# Altium PCB USB2514 PCB v1.PcbDoc
Units mm, origin at the board's own origin, x right, y up, seen from the top; angles counter-clockwise.
Board outline 47 x 45 mm, 2 copper layers (Top Layer, Bottom Layer); 57 components, 45 nets, 195 pads, 88 vias.
Unrouted connection lines stored in the file: 3.
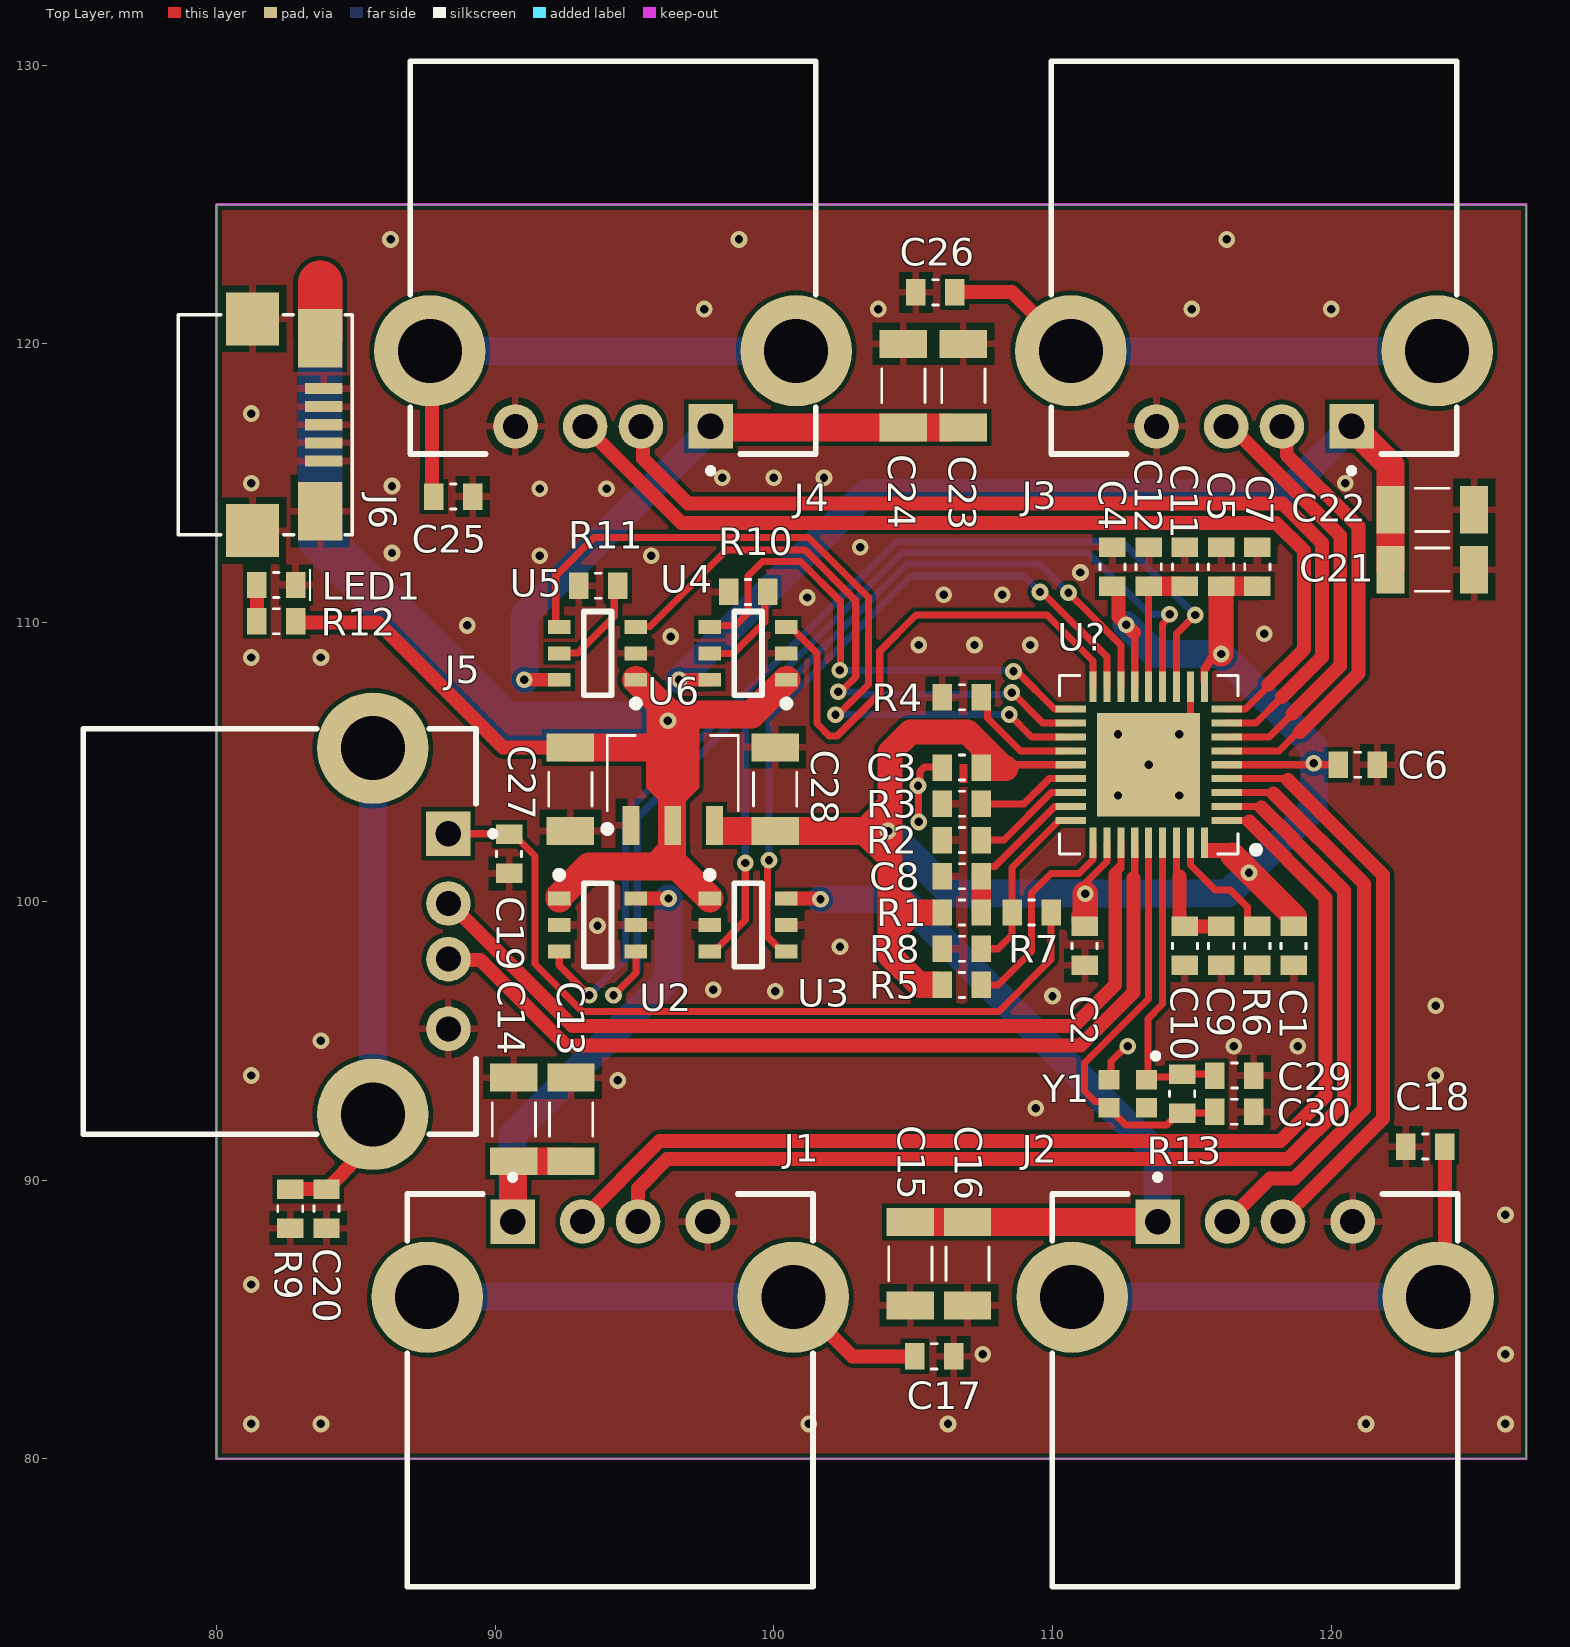
[diagram p0: Top Layer view]
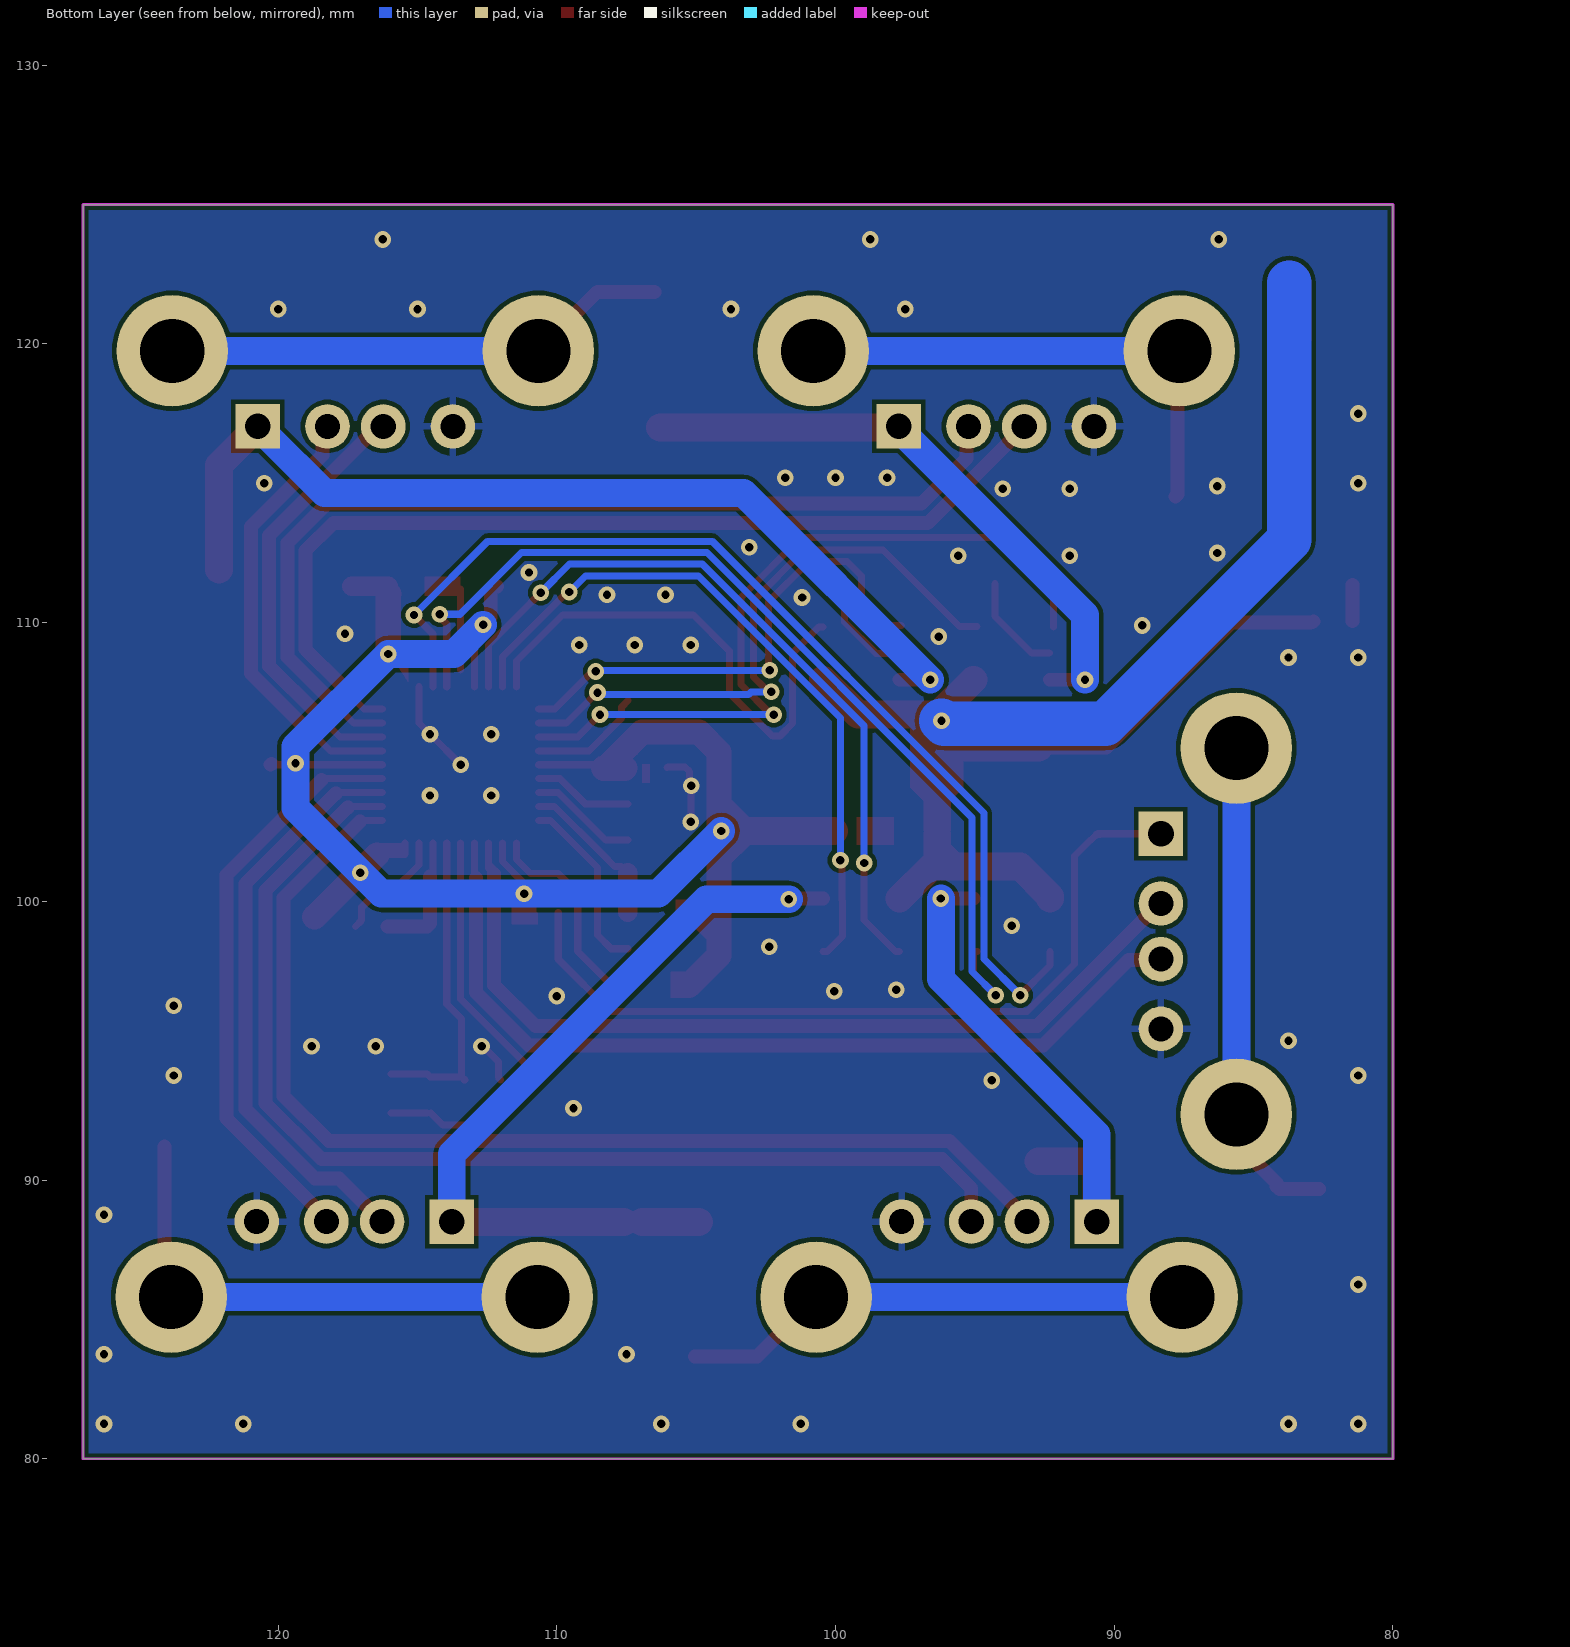
[diagram p1: Bottom Layer view, seen from below]
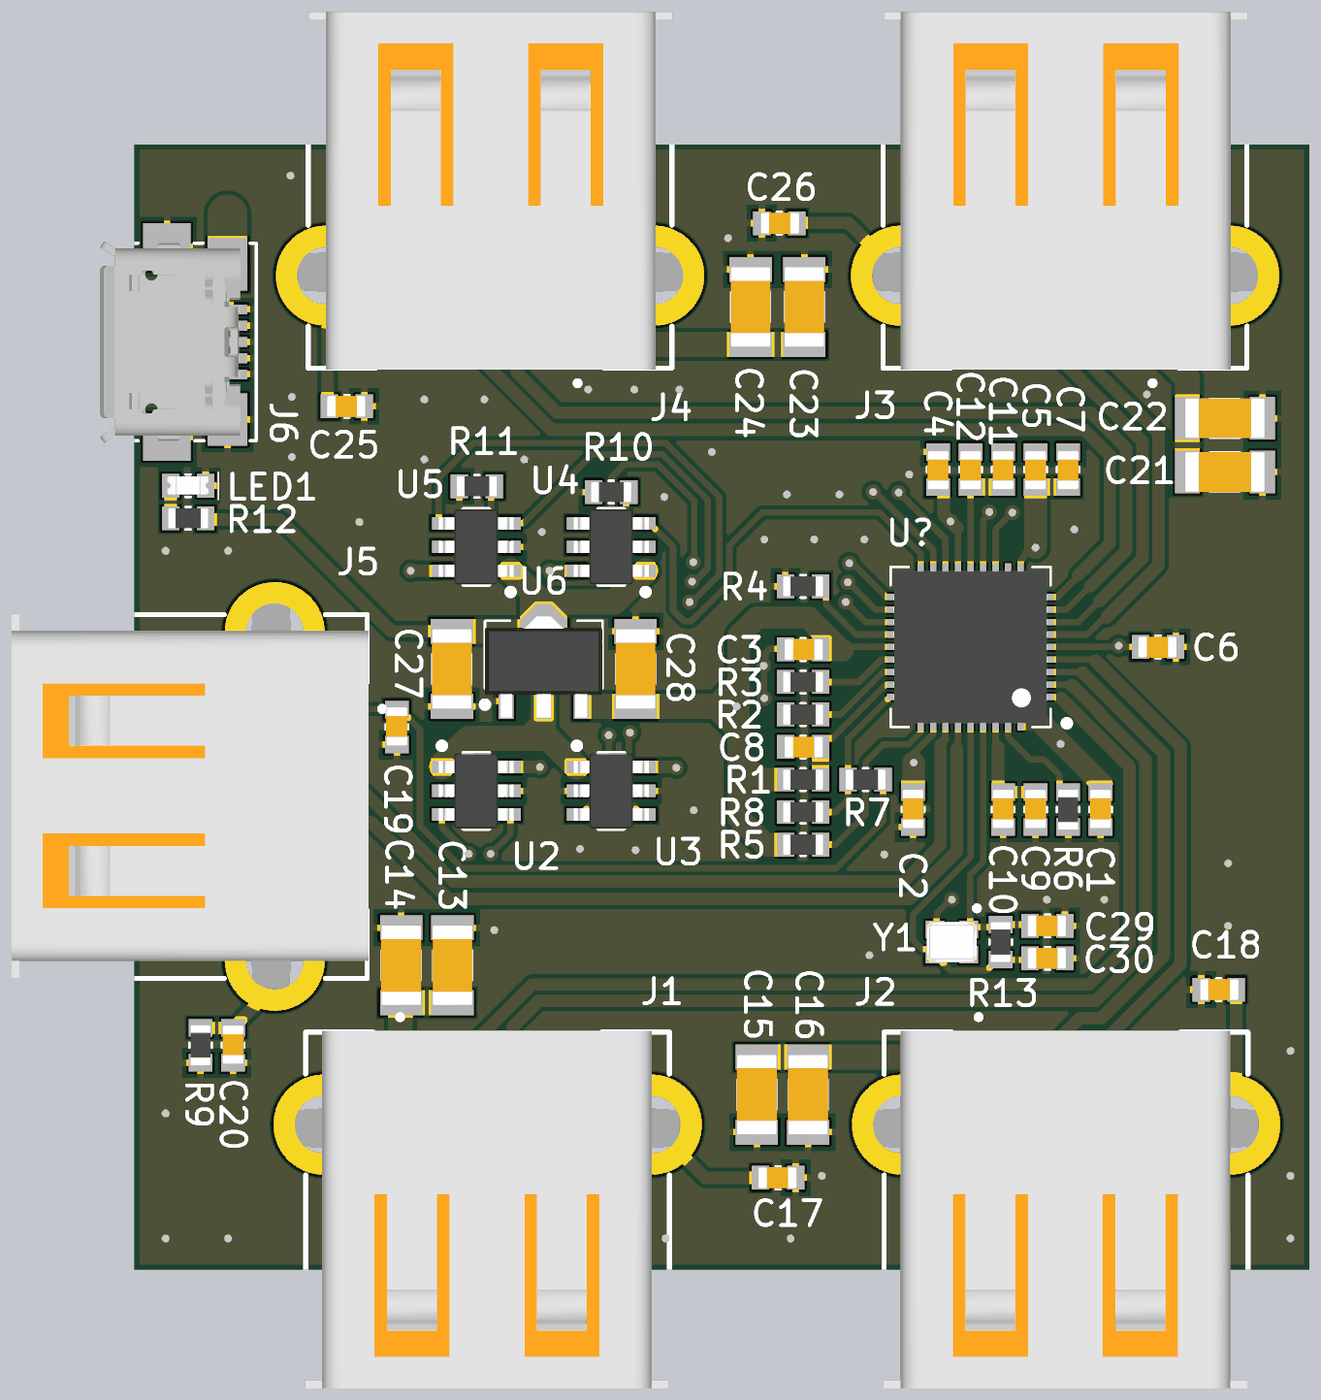
[diagram p2: 3D render of the assembled board from above, using the file's embedded part models]

## Layer stack, top to bottom
Top Solder: solder mask 0.0102, Solder Resist, Dk 3.5
Top Layer: signal copper 0.0356
Dielectric 1: dielectric 0.32, FR-4, Dk 4.8
Bottom Layer: signal copper 0.0356
Bottom Solder: solder mask 0.0102, Solder Resist, Dk 3.5

## Board outline
80,80 80,125 127,125 127,80

## Design rules (kind name [scope] priority, off if disabled: settings)
Clearance [All] p1: gap=0.152 ignorepadtopadclearanceinfootprint=FALSE
DiffPairsRouting [All] p1: maxlimit=0.254 minlimit=0.1 mostfreqgap=0.152 toplayer_minwidth=0.1 toplayer_maxwidth=1 toplayer_prefwidth=0.254 bottomlayer_minwidth=0.1 bottomlayer_maxwidth=1 bottomlayer_prefwidth=0.254 maxuncoupledlength=12.7
PolygonConnect [All] p1: connectstyle=Relief reliefconductorwidth=0.254 reliefentries=4 polygonreliefangle="90 Angle" airgapwidth=0.254
RoutingVias [All] p1: holewidth=0.3 width=0.6 viastyle="Through Hole" minholewidth=0.1 minwidth=0.1 maxholewidth=2 maxwidth=2
ShortCircuit [All] p1: allowed=TRUE
SolderMaskExpansion [All] p1: expansion=0.102 istentingtop=FALSE
Width [All] p1: maxlimit=3 minlimit=0.254 preferedwidth=0.254 minimp=50.000000 maximp=50.000000 favimp=50.000000
28 further rules are at their usual default settings.

## Classes and differential pairs
component class "USB2514 USB PORTS": C13 C14 C15 C16 C17 C18 C19 C21 C22 C23 C24 C25 C26 J1 J2 J3 J4 J5 R7 R8
component class "USB2514 REGULATOR": C27 C28 J6 LED1 R12
component class "USB2514 POWER DISTRIBUTION SWITCHES": R10 R11 U2 U3 U4 U5
component class "USB2514 MCU": C1 C2 C3 C4 C5 C6 C7 C8 C9 C10 C11 C12 R1 R2 R3 R4 R5 R6 U?
component class "USB2514 CRYSTAL": C29 C30 R13 Y1

## Components (designator, comment, footprint, x,y, rotation, side; value= is the part's Value field where it differs from the comment)
C1 "0.1uF" CAPC1608X06N-0603 118.65,98.4 r90 top
C2 "0.1uF" CAPC1608X06N-0603 111.15,98.4 r90 top
C3 "0.1uF" CAPC1608X06N-0603 106.75,104.8 r0 top
C4 "0.1uF" CAPC1608X06N-0603 112.15,112 r270 top
C5 "0.1uF" CAPC1608X06N-0603 116.05,112 r270 top
C6 "0.1uF" CAPC1608X06N-0603 120.95,104.9 r180 top
C7 "4.7uF 6.3V X5R" CAPC1608X06N-0603 117.35,112 r270 top
C8 "0.1uF" CAPC1608X06N-0603 106.75,100.9 r0 top
C9 "0.1uF" CAPC1608X06N-0603 116.05,98.4 r90 top
C10 "1uF 16V X5R" CAPC1608X06N-0603 114.75,98.4 r90 top
C11 "0.1uF" CAPC1608X06N-0603 114.75,112 r270 top
C12 "1uF 16V X5R" CAPC1608X06N-0603 113.45,112 r270 top
C13 "22uF" CAPC3216X10N-1206 92.725,92.175 r270 top
C14 "22uF" CAPC3216X10N-1206 90.675,92.175 r270 top
C15 "22uF" CAPC3216X10N-1206 104.9,87 r90 top
C16 "22uF" CAPC3216X10N-1206 106.95,87 r90 top
C17 "0.1uF" CAPC1608X06N-0603 105.75,83.675 r180 top
C18 "0.1uF" CAPC1608X06N-0603 123.375,91.2 r0 top
C19 "1uF 16V X5R" CAPC1608X06N-0603 90.5,101.7 r90 top
C20 "0.1uF" CAPC1608X06N-0603 83.95,88.975 r90 top
C21 "22uF" CAPC3216X10N-1206 123.625,111.9 r180 top
C22 "22uF" CAPC3216X10N-1206 123.625,114.05 r180 top
C23 "22uF" CAPC3216X10N-1206 106.8,118.5 r270 top
C24 "22uF" CAPC3216X10N-1206 104.65,118.5 r270 top
C25 "0.1uF" CAPC1608X06N-0603 88.5,114.525 r180 top
C26 "0.1uF" CAPC1608X06N-0603 105.8,121.85 r0 top
C27 "10uF" CAPC3216X10N-1206 92.7,104.025 r90 top
C28 "10uF" CAPC3216X10N-1206 100.05,104.025 r270 top
C29 "33pF" CAPC1608X06N-0603 116.525,93.75 r180 top
C30 "33pF" CAPC1608X06N-0603 116.525,92.45 r180 top
J1 "USB-A CONNECTOR" USB_SAMTEC_R-A-S-F-O-TH 90.63,88.51 r0 top
J2 "USB-A CONNECTOR" USB_SAMTEC_R-A-S-F-O-TH 113.77,88.51 r0 top
J3 "USB-A CONNECTOR" USB_SAMTEC_R-A-S-F-O-TH 120.73,117.04 r180 top
J4 "USB-A CONNECTOR" USB_SAMTEC_R-A-S-F-O-TH 97.73,117.04 r180 top
J5 "USB-A CONNECTOR" USB_SAMTEC_R-A-S-F-O-TH 88.325,102.425 r270 top
J6 "MICRO USB2.0" USB_CON_10118192-0001LF_SMD 82.575,117.1 r270 top
LED1 "LED RED" LED_0603 81.45,111.35 r0 top
R1 "100K" RESC1608X06N-0603 106.75,99.6 r180 top
R2 "100K" RESC1608X06N-0603 106.75,102.2 r0 top
R3 "100K" RESC1608X06N-0603 106.75,103.5 r0 top
R4 "100K" RESC1608X06N-0603 106.75,107.325 r0 top
R5 "100K" RESC1608X06N-0603 106.75,97 r180 top
R6 "12K" RESC1608X06N-0603 117.35,98.4 r90 top
R7 "100K" RESC1608X06N-0603 109.25,99.6 r0 top
R8 "100K" RESC1608X06N-0603 106.75,98.3 r0 top
R9 "330" RESC1608X06N-0603 82.65,88.975 r90 top
R10 "390" RESC1608X06N-0603 99.075,111.1 r0 top
R11 "390" RESC1608X06N-0603 93.7,111.325 r0 top
R12 "1K" RESC1608X06N-0603 82.15,110.05 r0 top
R13 "1Meg" RESC1608X06N-0603 114.65,93.1 r270 top
U2 "MIC2019A-1YM6 TR" SOT95P280X90-6N 93.675,99.15 r0 top
U3 "MIC2019A-1YM6 TR" SOT95P280X90-6N 99.075,99.15 r0 top
U4 "MIC2019A-1YM6 TR" SOT95P280X90-6N 99.075,108.9 r180 top
U5 "MIC2019A-1YM6 TR" SOT95P280X90-6N 93.675,108.9 r180 top
U6 "HT7333-1" SOT89-150P350X150-3N 96.375,104.325 r90 top
U? "USB2514BT/M2" QFN50P600X600X100_HS-37N 113.45,104.9 r180 top
Y1 "24 MHz 6 pf CRYSTAL" OSC_XRCGB24M000F2P00R0 112.7,93.1 r270 top

## Footprints (in the part's own frame and the unit in brackets; to place one, negate y for a bottom-side part, rotate by r counter-clockwise, add the part's x,y. Pads: shape width x height; smd on the part's side, far side on the other; paste and mask are expansions set on the pad)
CAPC1608X06N-0603 [mm] "Chip Capacitor, 2-Leads, Body 1,55x0,85mm, IPC Medium Density"
  rect 0.7x0.95 smd: 1(-0.7,0) 2(0.7,0)
  silkscreen extent -0.1,-0.45 0.1,0.45, body extent -0.75,-0.42 0.8,0.43, height 0.55
CAPC3216X10N-1206 [mm] "Chip Capacitor, 2-Leads, Body 3,20x1,60mm, IPC Medium Density"
  rect 1x1.7 smd: 1(-1.5,0) 2(1.5,0)
  silkscreen extent -0.6,-0.77 0.6,0.77, body extent -1.6,-0.8 1.6,0.8, height 1
LED_0603 [mm]
  rect 0.7x0.95 smd: A(0,0) C(1.4,0)
  silkscreen extent 0.6,-0.57 1.95,0.58, body extent -0.13,-0.35 1.53,0.38, height 0.68
OSC_XRCGB24M000F2P00R0 [mm]
  rect 0.7x0.75 smd: 1(-0.5,0.675) 2(-0.5,-0.675) 3(0.5,-0.675) 4(0.5,0.675)
  silkscreen extent -1.45,0.9 -1.25,1.1, body extent -0.8,-1 0.8,1, height 0.7
QFN50P600X600X100_HS-37N [mm] "QFN, 36-Leads, Body 6,00x6,00mm, Pitch 0,50mm, Thermal Pad 3,70x3,70mm, IPC Medium Density"
  rect 1.1x0.254 smd mask+0.076: 1(-2.8,2) 2(-2.8,1.5) 3(-2.8,1) 4(-2.8,0.5) 5(-2.8,0) 6(-2.8,-0.5) 7(-2.8,-1) 8(-2.8,-1.5) 9(-2.8,-2) 19(2.8,-2) 20(2.8,-1.5) 21(2.8,-1) 22(2.8,-0.5) 23(2.8,0) 24(2.8,0.5) 25(2.8,1) 26(2.8,1.5) 27(2.8,2)
  rect 0.254x1.1 smd mask+0.076: 10(-2,-2.8) 11(-1.5,-2.8) 12(-1,-2.8) 13(-0.5,-2.8) 14(0,-2.8) 15(0.5,-2.8) 16(1,-2.8) 17(1.5,-2.8) 18(2,-2.8) 28(2,2.8) 29(1.5,2.8) 30(1,2.8) 31(0.5,2.8) 32(0,2.8) 33(-0.5,2.8) 34(-1,2.8) 35(-1.5,2.8) 36(-2,2.8)
  rect 3.7x3.7 smd: 37(0,0)
  silkscreen extent -3.98,-3.2 3.2,3.2, body extent -3.07,-3.07 3.07,3.07, height 1
RESC1608X06N-0603 [mm] "Chip Capacitor, 2-Leads, Body 1,55x0,85mm, IPC Medium Density"
  rect 0.7x0.95 smd: 1(-0.7,0) 2(0.7,0)
  silkscreen extent -0.1,-0.45 0.1,0.45, body extent -0.8,-0.4 0.8,0.4, height 0.8
SOT89-150P350X150-3N [mm] "SOT89, 3-Leads, Body 4,55x2,50mm, Pitch 1,50mm, Lead Span 3,5mm, IPC Medium Density"
  rect 1.4x0.6 smd: 1(-1.6,1.5) 2(-1.6,0) 3(-1.6,-1.5)
  Top Layer region: -1,0.2 -0.25,0.95 1.65,0.95 2.3,0.3 2.3,-0.3 1.65,-0.95 -0.25,-0.95 -1,-0.2
  silkscreen extent -1.85,-2.35 1.62,2.47, body extent -2.25,-2.35 1.8,2.35, height 1.5
SOT95P280X90-6N [mm] "SOT23, 6-Leads, Body 2,90x2,80mm, Pitch 0,95mm, IPC Medium Density"
  rect 0.8x0.5 smd: 1(-1.375,0.95) 2(-1.375,0) 3(-1.375,-0.95) 4(1.375,-0.95) 5(1.375,0) 6(1.375,0.95)
  silkscreen extent -1.5,-1.5 0.5,1.92, body extent -1.5,-1.5 1.5,1.5, height 0.9
USB_CON_10118192-0001LF_SMD [mm] "USB2.0 MICRO"
  rect 0.4x1.35 smd: 1(-1.3,1.275) 2(-0.65,1.275) 3(0,1.275) 4(0.65,1.275) 5(1.3,1.275)
  rect 2.1x1.6 smd: 6(-3.1,1.15) 7(3.1,1.15)
  rect 1.9x1.9 smd: 8(-3.8,-1.275) 9(3.8,-1.275)
  silkscreen extent -3.95,-3.94 3.95,2.3, body extent -4.04,-3.94 4.04,1.66, height 2.81
USB_SAMTEC_R-A-S-F-O-TH [mm]
  rect 1.6x1.6 hole 0.92: 1(0,0)
  round 1.6 hole 0.9: 2(2.5,0) 3(4.5,0) 4(7,0)
  round 4 hole 2.3: S1(-3.07,-2.71) S2(10.07,-2.71)
  silkscreen extent -3.77,-13.11 10.78,1.69, body extent -4.37,-13.25 11.32,1.05, height 7.5

## Part data
C1 C2 C3 C4 C5 C6 C7 C8 C9 C10 C11 C12 C17 C18 C19 C20 C25 C26 C29 C30: library part CAP_0603_0.1uF
C13 C14 C15 C16 C21 C22 C23 C24 C27 C28: library part CAP_1206_22uF
J1 J2 J3 J4 J5: library part USBR-A-S-F-O-TH, "USB-A _USB TYPE-A_ USB 2.0 Receptacle Connector 4 Position Through Hole, Right Angle", Package=None, Availability=Unavailable, DigiKey-Purchase-URL=https://snapeda.com/shop?store=DigiKey&id=932528, MF=Samtec, MP=USBR-A-S-F-O-TH, Price=None, SnapEDA_Link=https://www.snapeda.com/parts/USBR-A-S-F-O-TH/Samtec%20Inc./view-part/932528/?ref=snap, Toby_UK-Purchase-URL=https://snapeda.com/shop?store=Toby+UK&id=932528
J6: library part USB_CON-10118192-0002LF-SMD, "USB - micro B USB 2.0 Receptacle Connector 5 Position Surface Mount, Right Angle", Case/Package=SMD, Manufacturer="Amphenol ICC (FCI)", Manufacturing Part Number=10118192-0002LF, Supplier Part Number-1=609-5379-1-ND, Supplier-1=Digikey
LED1: library part LED_RED_0603
R1 R2 R3 R4 R5 R6: library part RES_0603_10K
R7 R8 R9 R10 R11 R12 R13: library part RES_0603_1K
U6: "HT7333-1 / 30V, 250mA TinyPowerTM LDO"
U?: "USB Hub Controller USB Interface 36-SQFN (6x6)", Package="VFQFN-36 Microchip", Availability=Warning, Check_prices=https://www.snapeda.com/parts/USB2514BT/M2/Microchip/view-part/1051251/?ref=eda, MF=Microchip, MP=USB2514BT/M2, Price=None, Purchase-URL=https://pricing.snapeda.com/search/part/USB2514BT/M2/?ref=eda, SnapEDA_Link=https://www.snapeda.com/parts/USB2514BT/M2/Microchip/view-part/1051251/?ref=snap
Y1: "8 MHz 12.5 pf Osc"

## Via types
v1: diameter 0.6, hole 0.3, Top Layer to Bottom Layer, tented both sides, 88 vias

## Nets (pads, with @x,y where several pads share a name; then routed paths per layer and width w, separated by ;. In a path a pad name is that pad's centre, name@x,y a point inside that pad or via, vN(x,y) a via of type N, cw(c..) or ccw(c..) an arc to the next point about the centre after c; other vN are vias at no path point)
3,3V: C1.2 C2.2 C3.2 C4.2 C5.2 C6.2 C7.2 C28.2 R1.2 R5.2 U6.3 U?.5 U?.10 U?.15 U?.23 U?.29 U?.36 | length 67.8
  Top Layer w0.254: 108.341,104.76 108.481,104.9 U?.23 ; 111.15,100.625 111.95,101.425 U?.29 ; 112.921,109.65 112.95,109.621 U?.15 ; U?.36 115.45,101.677 116.449,101.677 116.463,101.663 ; U?.5 C6.2
  Top Layer w0.5: C4.2 112.271,111.3 112.371,111.2 112.371,110.2 112.921,109.65 ; C6.2@120.244,104.931 C6.2@120.275,104.9
  Top Layer w0.7: C5.2 C7.2
  Top Layer w0.9: v1(104.1,102.525) v1@104.175,102.6 ; 105.45,96.975 105.252,96.975 104.175,98.052 v1@104.175,102.6 ; C3.2@107.55,104.775 108.325,104.775 ; 108.075,104.95 106.95,106.075 104.9,106.075 104.175,105.35 v1@104.175,102.6 ; 111.175,99.625 v1(111.175,100.275) ; C5.2@116.025,111.025 116.05,111 v1(116.05,108.875) ; 116.463,101.663 C1.2@118.688,99.438
  Top Layer w1: C28.2 v1(104.1,102.525)
  Bottom Layer w1: v1(104.1,102.525) 106.35,100.275 v1(111.175,100.275) 116.3,100.275 v1(117.05,101.025) 119.375,103.35 v1(119.375,104.95) 119.375,105.55 v1(116.05,108.875) 113.696,108.875 v1(112.646,109.925)
+5: C27.2 J6.6 R12.2 U2.1 U3.1 U4.1 U5.1 U6.2 | length 57.8
  Top Layer w0.254: v1@95.913,106.475 v1(96.2,106.475)
  Top Layer w0.5: R12.2 82.95,110 85.8,110 90.275,105.525 C27.2
  Top Layer w1: U2.1 92.3,100.177 93.373,101.25 95.764,101.25 ; C27.2 93.343,105.525 96.273,105.525 ; U5.1 96.3,106.7 99.2,106.7 U4.1 ; U6.2@96.35,102.4 96.35,101.836 95.764,101.25 ; U6.2@96.35,102.6 96.35,104.127 ; U3.1 96.55,101.25 95.764,101.25
  Top Layer w1.6: J6.6 83.725,122.2
  Bottom Layer w1.6: 83.725,122.2 83.725,112.975 90.325,106.375 96.1,106.375 v1(96.2,106.475)
GND: C1.1 C2.1 C3.1 C4.1 C5.1 C6.1 C7.1 C8.1 C9.1 C10.1 C11.1 C12.1 C13.1 C14.1 C15.1 C16.1 C17.1 C18.1 C19.1 C20.1 C21.1 C22.1 C23.1 C24.1 C25.1 C26.1 C27.1 C28.1 C29.1 C30.1 J1.4 J2.4 J3.4 J4.4 J5.4 J6.1 J6.2 J6.3 J6.4 J6.5 J6.7 J6.8 J6.9 LED1.C R2.1 R3.1 R4.1 R6.1 R8.1 R9.1 R10.1 R11.1 U2.2 U2.5 U3.2 U3.5 U4.2 U5.2 U6.1 U?.11 U?.37 Y1.2 Y1.4 | length 7.7
  Top Layer w0.254: v1(105.2,102.85) 105.187,102.863 105.187,104.138 v1(105.175,104.15) 105.241,104.216 105.241,104.666 105.4,104.825 106.025,104.825 C3.1 ; Y1.2 112.1,93.675 112.1,94.25 112.65,94.8 v1(112.7,94.8) ; v1(113.45,104.9) v1(114.55,106) 114.95,106.4 U?.11
  other v1: 81.25,81.25 83.75,81.25 101.25,81.25 106.25,81.25 121.25,81.25 126.25,81.25 107.5,83.75 126.25,83.75 81.25,86.25 126.25,88.75 109.4,92.575 94.4,93.575 81.25,93.75 123.75,93.75 116.5,94.8 118.8,94.8 83.75,95 123.75,96.25 110,96.6 100.05,96.775 97.825,96.825 102.375,98.375 93.675,99.125 112.35,103.8 114.55,103.8 112.35,106 81.25,108.75 83.75,108.75 105.2,109.2 107.2,109.2 109.2,109.2 96.3,109.5 117.6,109.6 89,109.9 101.2,110.9 106.1,111 108.2,111 111,111.8 91.6,112.4 95.6,112.4 86.3,112.5 103.1,112.7 91.6,114.8 94,114.8 86.3,114.9 81.25,115 120.5,115 98.15,115.2 100,115.2 101.8,115.2 81.25,117.5 97.5,121.25 103.75,121.25 115,121.25 120,121.25 86.25,123.75 98.75,123.75 116.25,123.75
NetC8_2: C8.2 R1.1 U?.26 | length 5.6
  Top Layer w0.254: C8.2@107.45,101.025 107.673,101.248 107.926,101.248 108.35,101.672 110.078,103.4 U?.26
  Top Layer w0.7: R1.1 C8.2@107.45,101.025
NetC9_2: C9.2 C10.2 U?.34 | length 4.6
  Top Layer w0.254: U?.34 114.45,101 114.55,100.9
  Top Layer w0.5: 114.55,100.9 114.55,99.2 114.65,99.1 C10.2 ; C10.2@114.675,99.1 C9.2@116.075,99.1
NetC11_2: C11.2 C12.2 U?.14 | length 2.9
  Top Layer w0.254: 113.45,108.3 C12.2@113.45,111.2
NetC17_2: C17.2 J1.S1 J1.S2 | length 18.6
  Top Layer w0.5: J1.S1@87.41,85.95 J1.S1 ; J1.S2 102.825,83.675 C17.2
  Bottom Layer w1: J1.S1 J1.S2
NetC18_2: C18.2 J2.S1 J2.S2 | length 19.7
  Top Layer w0.5: J2.S2 J2.S2@123.84,86.747 ; J2.S2@124.075,85.575 C18.2
  Bottom Layer w1: J2.S1 J2.S2
NetC19_2: C19.2 J5.1 R7.2 | length 29.1
  Top Layer w0.254: J5.1 90.575,102.425 C19.2@90.624,102.376 ; C19.2 90.65,102.4 90.65,102.375 90.848,102.177 90.873,102.177 91.425,101.625 91.425,97.75 93.125,96.05 108.08,96.05 109.95,97.92 R7.2
NetC20_2: C20.2 J5.S1 J5.S2 R9.2 | length 17.9
  Top Layer w0.5: R9.2 84.075,89.675 84.175,89.775 84.175,89.9 84.945,90.67 84.945,91.685 J5.S2
  Bottom Layer w1: J5.S2 J5.S1
NetC25_2: C25.2 J4.S1 J4.S2 | length 18.4
  Top Layer w0.5: J4.S2 87.73,119.68 87.73,114.595 C25.2
  Bottom Layer w1: J4.S2 J4.S1
NetC26_2: C26.2 J3.S1 J3.S2 | length 18.2
  Top Layer w0.5: C26.2@106.5,121.859 108.551,121.859 J3.S2
  Bottom Layer w1: J3.S2 J3.S1
NetLED1_A: LED1.A R12.1 | length 1.3
  Top Layer w0.5: R12.1 LED1.A
NetR2_2: R2.2 U?.25 | length 3.9
  Top Layer w0.254: R2.2 108.255,102.2 109.955,103.9 U?.25
NetR3_2: R3.2 U?.24 | length 3.6
  Top Layer w0.254: R3.2 108.981,103.5 109.881,104.4 U?.24
NetR4_2: R4.2 U?.22 | length 4.2
  Top Layer w0.254: R4.2@107.45,107.2 107.673,106.977 107.673,106.577 108.85,105.4 U?.22
NetR5_1: R5.1 U?.28 | length 7.7
  Top Layer w0.254: R5.1 108.05,97 109.25,98.2 109.25,100.3 109.95,101 110.95,101 111.45,101.5 U?.28
NetR6_2: R6.2 U?.35 | length 4.3
  Top Layer w0.254: U?.35 114.95,101.3 115.85,100.4 116.389,100.4 117.002,99.787 117.002,99.323 R6.2@117.225,99.1
NetR10_2: R10.2 U4.5 | length 3.4
  Top Layer w0.254: U4.5 98.553,108.9 99.675,110.022 R10.2@99.675,111
NetR11_2: R11.2 U5.5 | length 3.7
  Top Layer w0.254: U5.5@92.325,108.912 92.966,108.912 94.275,110.22 R11.2@94.275,111.399
OCS_N1: U2.4 U?.13 | length 35.4
  Top Layer w0.254: v1(94.25,96.629) 95.05,97.429 U2.4 U2.4@94.9,98.2 ; U?.13 113.95,109.956 114.2,110.206 v1(114.2,110.3)
  Bottom Layer w0.254: v1(94.25,96.629) 95.1,97.479 95.1,103 104.612,112.512 111.263,112.512 113.475,110.3 v1(114.2,110.3)
OCS_N2: U3.4 U?.17 | length 25.3
  Top Layer w0.254: v1(99.825,101.475) 99.771,101.421 99.771,100.049 99.75,100.028 99.75,98.75 100.3,98.2 U3.4 ; v1(109.55,111.1) 109.625,111.1 111.95,108.775 U?.17
  Bottom Layer w0.254: v1(99.825,101.475) 99.825,106.577 104.923,111.675 108.975,111.675 v1(109.55,111.1)
OCS_N3: U4.4 U?.19 | length 18.4
  Top Layer w0.254: U4.4@97.641,109.9 98.625,109.9 99.075,110.35 99.075,111.675 99.594,112.194 100.958,112.194 102.4,110.752 102.4,108.333 v1(102.361,108.294) ; v1(108.6,108.25) 108.666,108.184 108.791,108.184 110.075,106.9 U?.19
  Bottom Layer w0.254: v1(102.361,108.294) 102.367,108.288 108.563,108.288 v1(108.6,108.25)
OCS_N4: U5.4 U?.21 | length 28
  Top Layer w0.254: U5.4@92.175,109.85 92.175,111.7 ; 92.2,111.7 93.55,113.05 101.25,113.05 103.394,110.906 103.394,107.784 102.307,106.697 v1(102.213,106.697) ; v1(108.45,106.7) 109.25,105.9 U?.21
  Bottom Layer w0.254: v1(102.213,106.697) 102.925,106.697 108.447,106.697 v1(108.45,106.7)
PRTPWR1: U2.3 U?.12 | length 37.5
  Top Layer w0.254: U2.3@92.313,98.187 U2.3 92.3,97.7 93.371,96.629 v1(93.375,96.629) ; U?.12 114.45,109.602 v1(115.123,110.275)
  Bottom Layer w0.254: v1(93.375,96.629) 94.675,97.929 94.675,103.168 104.425,112.918 112.48,112.918 v1(115.123,110.275)
PRTPWR2: U3.3 U?.16 | length 27.3
  Top Layer w0.254: U3.3 97.85,98.2 98.975,99.325 v1(98.975,101.375) ; v1(110.575,111.075) 111.325,110.325 112.45,109.2 U?.16
  Bottom Layer w0.254: v1(98.975,101.375) 98.975,106.301 104.78,112.106 109.544,112.106 v1(110.575,111.075)
PRTPWR3: U4.3 U?.18 | length 18.4
  Top Layer w0.254: U4.3 100.6,109.85 101.55,108.9 101.55,106.375 102,105.925 102.26,105.925 103.8,107.465 103.8,108.975 105.1,110.275 109.8,110.275 111.45,108.625 U?.18
PRTPWR4: U5.3 U?.20 | length 22.3
  Top Layer w0.254: U5.3@94.932,109.857 95.557,109.857 98.3,112.6 101.126,112.6 102.94,110.786 102.94,108.054 102.576,107.69 102.402,107.517 v1(102.308,107.517) ; v1(108.541,107.491) 108.559,107.491 109.65,106.4 U?.20
  Bottom Layer w0.254: v1(102.308,107.517) 103.024,107.517 103.116,107.425 108.475,107.425 v1(108.541,107.491)
PWR1: C13.2 C14.2 J1.1 U2.6 | length 19.3
  Top Layer w0.5: U2.6 v1(96.223,100.1)
  Top Layer w1: J1.1 90.63,88.799 90.641,88.81 90.641,90.675 C13.2
  Bottom Layer w1: J1.1 90.63,91.63 96.223,97.223 v1(96.223,100.1)
PWR2: C15.2 C16.2 J2.1 U3.6 | length 28.4
  Top Layer w0.5: U3.6 101.623,100.1 101.648,100.075 v1(101.675,100.075)
  Top Layer w1: C15.2 C16.2 ; C16.2@107.593,88.5 108.918,88.5 J2.1@113.77,88.5 ; 109.65,88.5 110.293,88.5
  Bottom Layer w1: v1(101.675,100.075) 104.625,100.075 113.77,90.93 J2.1
PWR3: C21.2 C22.2 J3.1 U4.6 | length 34.7
  Top Layer w0.5: v1(96.6,107.95) U4.6
  Top Layer w1: J3.1 121.03,116.74 122.125,115.645 C21.2
  Bottom Layer w1: v1(96.6,107.95) 103.3,114.65 118.34,114.65 120.43,116.74 J3.1
PWR4: C23.2 C24.2 J4.1 U5.6 | length 21.7
  Top Layer w0.5: v1(91.05,107.95) U5.6
  Top Layer w1: J4.1@97.77,117 C23.2@106.3,117
  Bottom Layer w1: v1(91.05,107.95) 91.05,110.28 97.43,116.66 97.43,116.74 97.69,117 J4.1@97.77,117
USBDM_DN1: J1.2 U?.1 | length 40.4
  Top Layer w0.254: U?.1 117.025,102.9
  Top Layer w0.5: J1.2 93.13,88.627 95.905,91.402 118.183,91.402 119.8,93.019 119.8,100.125 117.063,102.862
USBDM_DN2: J2.2 U?.3 | length 21.1
  Top Layer w0.254: U?.3 117.252,103.9 117.896,103.9 117.925,103.871
  Top Layer w0.5: J2.2@116.142,88.382 117.81,90.05 118.675,90.05 121.175,92.55 121.175,100.632 117.936,103.871 117.925,103.871
USBDM_DN3: J3.2 U?.6 | length 15.8
  Top Layer w0.254: U?.6 118.125,105.4 118.8,106.075
  Top Layer w0.5: J3.2 118.404,116.866 118.404,116.021 120.975,113.45 120.975,108.178 118.872,106.075
USBDM_DN4: J4.2 U?.8 | length 35.3
  Top Layer w0.254: U?.8 117.3,106.4 118.225,107.325
  Top Layer w0.5: J4.2 95.309,116.961 95.309,115.884 96.917,114.275 118.247,114.275 119.671,112.851 119.671,108.771 118.225,107.325
USBDM_UP: J5.2 U?.30 | length 31.6
  Top Layer w0.254: 112.25,100.976 112.45,101.176 U?.30
  Top Layer w0.5: J5.2@88.287,99.888 88.41,99.888 92.776,95.521 110.771,95.521 112.25,97 112.25,100.976
USBDP_DN1: J1.3 U?.2 | length 40.9
  Top Layer w0.254: U?.2 117.46,103.4 117.489,103.371 ; 118.639,102.239 118.639,102.261 118.639,102.286
  Top Layer w0.5: J1.3 95.13,89.705 96.175,90.75 118.453,90.75 120.452,92.749 120.452,100.395 118.612,102.235 ; 117.489,103.371 117.507,103.371 118.628,102.25
USBDP_DN2: J2.3 U?.4 | length 21
  Top Layer w0.254: U?.4 118.4,104.4 118.451,104.349
  Top Layer w0.5: J2.3 118.27,88.62 121.85,92.2 121.85,100.95 118.451,104.349
USBDP_DN3: J3.3 U?.7 | length 15.7
  Top Layer w0.254: U?.7 117.775,105.9 118.606,106.731
  Top Layer w0.5: J3.3@116.112,117.158 116.286,117.158 120.323,113.121 120.323,108.448 118.606,106.731
USBDP_DN4: J4.3 U?.9 | length 35.2
  Top Layer w0.254: U?.9 116.925,106.9 117.75,107.725 117.75,107.775
  Top Layer w0.5: J4.3@92.973,117.297 96.691,113.579 118.021,113.579 119.019,112.581 119.019,109.044 117.75,107.775
USBDP_UP: J5.3 U?.31 | length 32
  Top Layer w0.254: 112.902,100.842 112.95,100.89 U?.31
  Top Layer w0.5: J5.3 88.359,97.891 89.484,97.891 92.55,94.825 110.997,94.825 112.902,96.73 112.902,100.842
VBUS_DET: R7.1 R8.2 U?.27 | length 6.5
  Top Layer w0.254: R8.2 108.05,98.3 108.543,98.793 108.543,101.216 110.227,102.9 U?.27
XTALIN: C29.2 R13.1 U?.33 Y1.1 | length 11.2
  Top Layer w0.254: Y1.1@113.3,93.6 Y1.1@113.325,93.6 ; U?.33 113.95,96.313 113.425,95.788 113.425,94.7 113.425,93.7 114.55,93.7 R13.1 C29.2@115.95,93.8
XTALOUT: C30.2 R13.2 U?.32 Y1.3 | length 15.2
  Top Layer w0.254: Y1.3@112,92.6 112.629,91.971 114.096,91.971 R13.2@114.525,92.4 ; Y1.3 111.802,92.823 111.52,92.823 111.15,93.193 111.15,94.2 113.45,96.5 U?.32 ; R13.2 C30.2@115.95,92.4

## Polygon pours and split planes (outlines as drawn)
GND on Bottom Layer "GND_L02_P000" (solid, pour order 0): 80,125 127,125 127,80 80,80
GND on Top Layer "GND_L01_P001" (solid, pour order 1): 80,125 127,125 127,80 80,80

## Keep-outs
Keep-Out Layer:
  the board outline again, w0.1

## Other copper
Top Layer:
  rectangle net GND: 106.654,104.254 106.948,104.927
  rectangle net 3,3V: 97.9,102.025 99.25,103.025
  rectangle net +5: 95.425,105.95 96.4,107
  rectangle net +5: 96.55,101.25 96.85,102.025
  rectangle net +5: 97,105.975 97.325,106.3
  rectangle net 3,3V: 107.1,105.25 107.8,105.525
  rectangle net 3,3V: 105.35,96.525 105.925,97.475
  rectangle net 3,3V: 104.15,99.125 105.75,100.075
  rectangle net 3,3V: 110.675,99.175 111.625,99.6
  rectangle net 3,3V: 115.45,101.677 116.449,102.1
  rectangle net NetC11_2: 113.45,110.95 114.75,111.65
  region net 3,3V: 105.3,99.3 104.5,98.5 104.1,98.5 104.1,99.625 103.9,99.825
  region net 3,3V: 104.575,100.65 105.325,99.9 105.325,99.5 105,99.5 103.875,100.625
  region net 3,3V: 103.05,102.05 103.775,101.325 104.475,101.325 104.475,102.225 104.138,102.562
  region net 3,3V: 103.1,103.025 103.825,103.75 103.875,103.75 103.875,103 103.075,102.7
  region net USBDM_UP: 112.125,101.175 112.45,101.5 112.45,101.176 112.35,101.076
  region net 3,3V: 115.325,108.375 115.325,107.861 116.118,109.078 115.9,109.95 115.9,109.3